# EAGLE board Varella_Aquisition_Module v.2.0 (EAGLE 9.4.2)
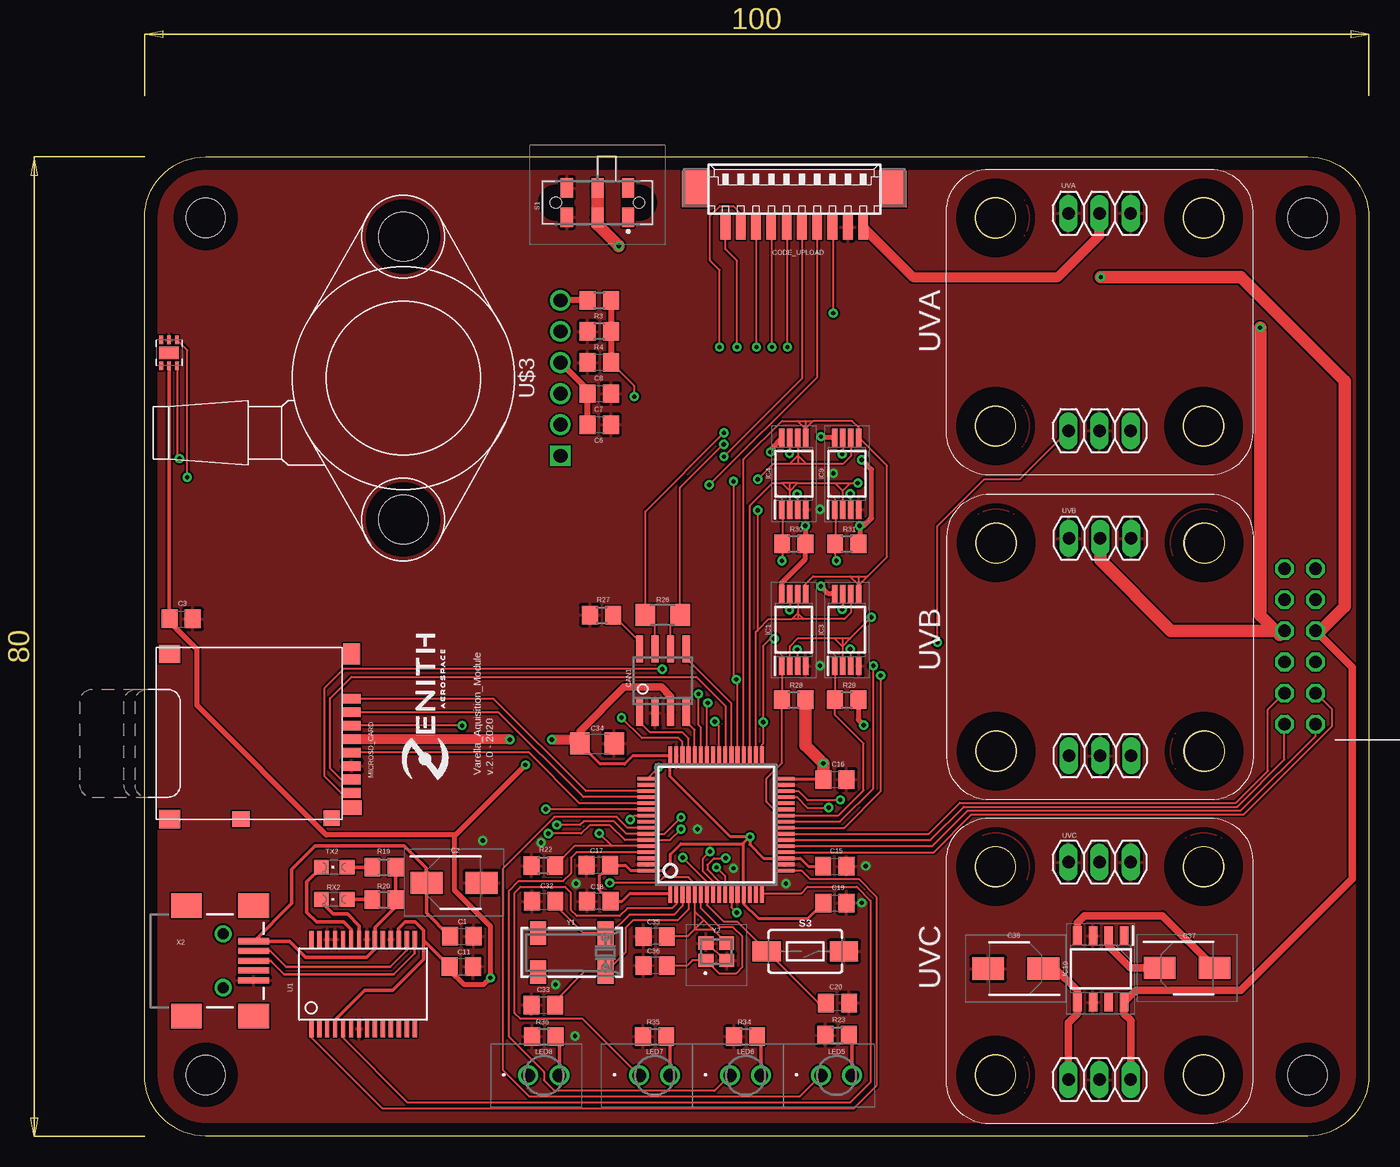
[diagram p0: board, top side]
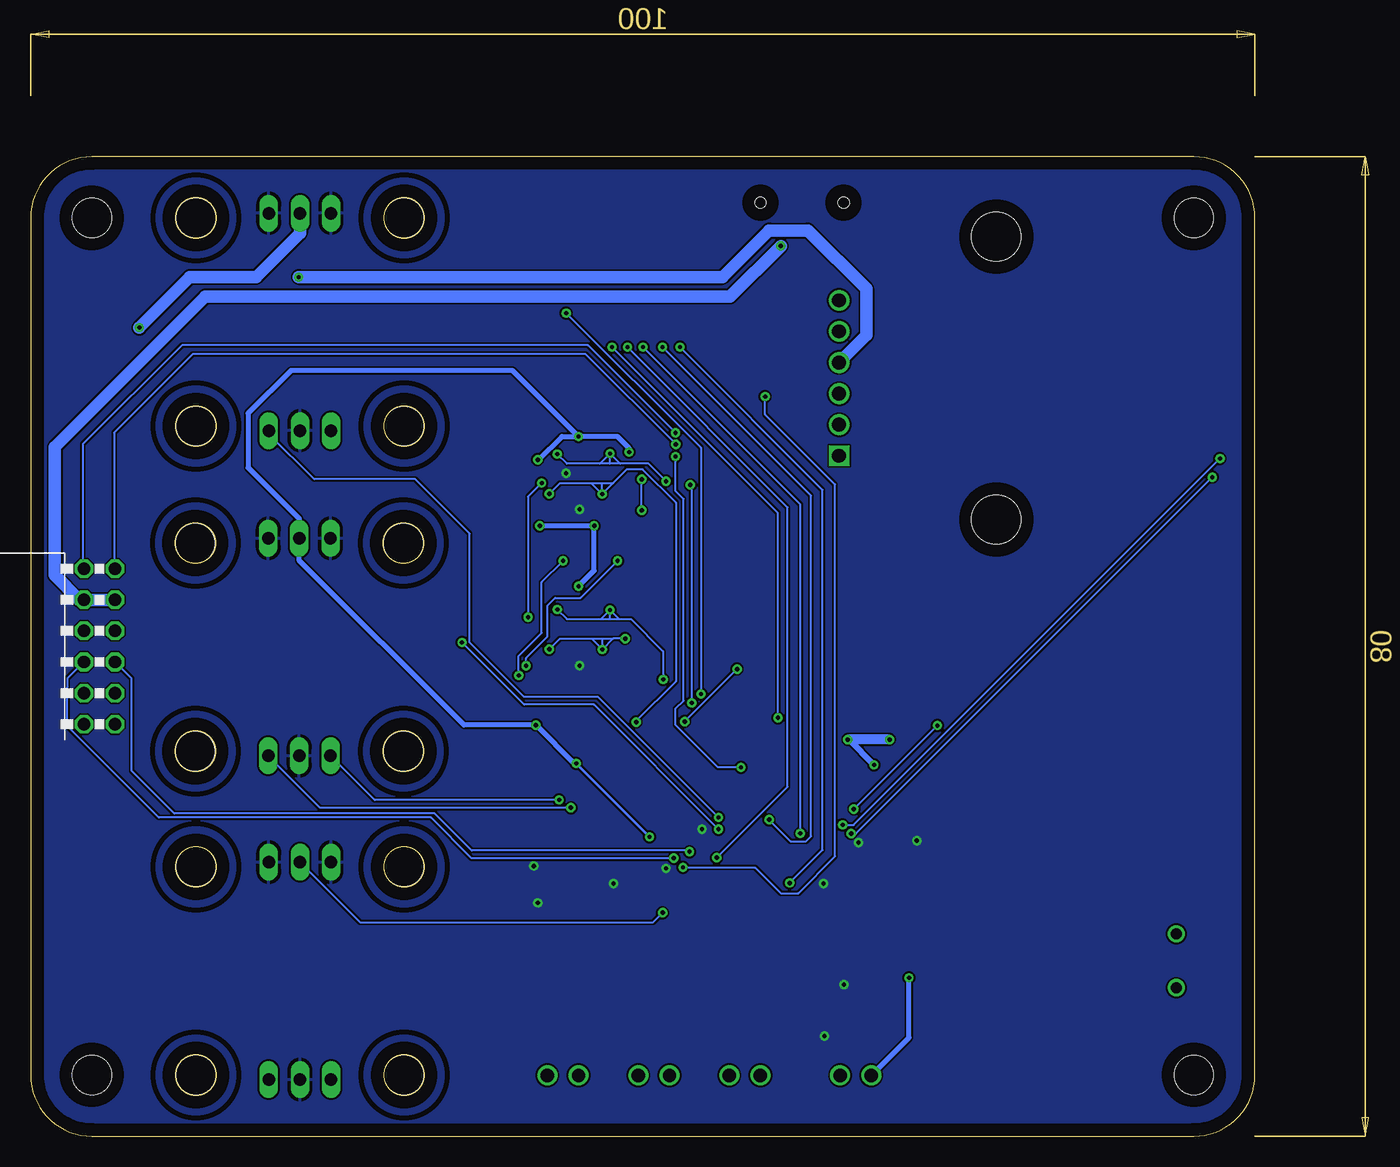
[diagram p1: board, bottom side, seen from below]

Size 100 x 80 mm. Coordinates in mm from the lower left corner, seen from the top.
Outline: 5,80 95,80 arc-90 100,75 100,5 arc-90 95,0 5,0 arc-90 0,5 0,75 arc-90 5,80
Copper layers (1*16): Top 0.035mm / dielectric 1.5mm / Bottom 0.035mm
Design rules "default": minimum track width 6mil, minimum drill 0.35mm, track to track 6mil, track to pad 6mil, pad to pad 6mil, via to via 6mil, smd to smd 6mil, copper to edge 40mil, drill to drill 6mil, minimum pad ring 10mil, minimum via ring 8mil, stop-mask expansion 4mil, vias tented up to drill 0mil, thermal gap 10mil
Net classes: 1 power: width 0.254 mm
Holes 3.2 mm at 5,5 95,5 95,75 5,75 69.5,75 86.5,75 86.5,58 69.5,58 69.5,5 86.5,5 86.5,22 69.5,22 69.56,31.44 86.56,31.44 69.56,48.44 86.56,48.44

## Footprints (pad centres in the part's own frame; a part is rotated, then mirrored left to right if it is on the bottom)
C0805 = smd 1.3 x 1.5: 1 -0.95,0; 2 0.95,0
CAPAE430X610N = smd 2.6 x 1.8: 1 -2.25,0; 2 2.25,0
C1206 = smd 1.6 x 1.8: 1 -1.4,0; 2 1.4,0
SOIC8 = smd 0.6 x 2.2: 1 -1.905,-2.6; 2 -0.635,-2.6; 3 0.635,-2.6; 4 1.905,-2.6; 5 1.905,2.6; 6 0.635,2.6; 7 -0.635,2.6; 8 -1.905,2.6
53261-10 = smd 0.8 x 2: 1 5.625,-2.5; 2 4.375,-2.5; 3 3.125,-2.5; 4 1.875,-2.5; 5 0.625,-2.5; 6 -0.625,-2.5; 7 -1.875,-2.5; 8 -3.125,-2.5; 9 -4.375,-2.5; 10 -5.625,-2.5 | smd 2.1 x 3: S1 8.125,0.625; S2 -8.125,0.625
LQFP64_10X10 = smd 0.3 x 1.6: 1 -3.75,-5.6; 2 -3.25,-5.6; 3 -2.75,-5.6; 4 -2.25,-5.6; 5 -1.75,-5.6; 6 -1.25,-5.6; 7 -0.75,-5.6; 8 -0.25,-5.6; 9 0.25,-5.6; 10 0.75,-5.6; 11 1.25,-5.6; 12 1.75,-5.6; 13 2.25,-5.6; 14 2.75,-5.6; 15 3.25,-5.6; 16 3.75,-5.6; 33 3.75,5.6; 34 3.25,5.6; 35 2.75,5.6; 36 2.25,5.6; 37 1.75,5.6; 38 1.25,5.6; 39 0.75,5.6; 40 0.25,5.6; 41 -0.25,5.6; 42 -0.75,5.6; 43 -1.25,5.6; 44 -1.75,5.6; 45 -2.25,5.6; 46 -2.75,5.6; 47 -3.25,5.6; 48 -3.75,5.6 | smd 1.6 x 0.3: 17 5.6,-3.75; 18 5.6,-3.25; 19 5.6,-2.75; 20 5.6,-2.25; 21 5.6,-1.75; 22 5.6,-1.25; 23 5.6,-0.75; 24 5.6,-0.25; 25 5.6,0.25; 26 5.6,0.75; 27 5.6,1.25; 28 5.6,1.75; 29 5.6,2.25; 30 5.6,2.75; 31 5.6,3.25; 32 5.6,3.75; 49 -5.6,3.75; 50 -5.6,3.25; 51 -5.6,2.75; 52 -5.6,2.25; 53 -5.6,1.75; 54 -5.6,1.25; 55 -5.6,0.75; 56 -5.6,0.25; 57 -5.6,-0.25; 58 -5.6,-0.75; 59 -5.6,-1.25; 60 -5.6,-1.75; 61 -5.6,-2.25; 62 -5.6,-2.75; 63 -5.6,-3.25; 64 -5.6,-3.75
SOP65P640X120-8N = smd 1.475 x 0.45: 1 -2.938,0.975; 2 -2.938,0.325; 3 -2.938,-0.325; 4 -2.938,-0.975; 5 2.938,-0.975; 6 2.938,-0.325; 7 2.938,0.325; 8 2.938,0.975
SOIC127P600X175-8N@1 = smd 1.525 x 0.7: 1 -2.712,1.905; 2 -2.712,0.635; 3 -2.712,-0.635; 4 -2.712,-1.905; 5 2.712,-1.905; 6 2.712,-0.635; 7 2.712,0.635; 8 2.712,1.905
PINHEAD_2X6_2.54MM_90º = drill 1.016 octagon: 1 0,0.04; 2 0,2.58; 3 2.54,0.04; 4 2.54,2.58; 5 5.08,0.04; 6 5.08,2.58; 7 7.62,0.04; 8 7.62,2.58; 9 10.16,0.04; 10 10.16,2.58; 11 12.7,0.04; 12 12.7,2.58
TLLG4400AS12 = drill 1.09 pad 1.635: 1 0,0; 2 2.54,0
MOLEX-502774-0891-MICROSD = smd 0.8 x 1.5: 1 -3.3,8.2; 2 -2.2,8.2; 3 -1.1,8.2; 4 0,8.2; 5 1.1,8.2; 6 2.2,8.2; 7 3.3,8.2; 8 4.4,8.2 | smd 1.29 x 1.3: 9 6.455,6.55 | smd 1.29 x 1.4: 10 6.54,-0.85 | smd 1.5 x 1.7: 11 6.54,-6.65; 12 -6.96,-6.65 | smd 1.7 x 1.4: 14 -6.96,8.2 | smd 1.2 x 1.6: 15 5.6,8.2
R0805 = smd 1.3 x 1.5: 1 -0.95,0; 2 0.95,0
R1206 = smd 1.6 x 1.803: 1 -1.422,0; 2 1.422,0
CHIPLED_0805 = smd 1.2 x 1.2: A 0,-1.05; C 0,1.05
JS202011JAQN = smd 1 x 1.6: 1 -2.5,2.95; 2 0,2.95; 3 2.5,2.95; 4 -2.5,0.55; 5 0,0.55; 6 2.5,0.55 | hole 0.9: -3.4,1.75; 3.4,1.75
TACTILE_SWITCH_SMD_6.0X3.5MM = smd 2.3 x 1.6: 1 -3.15,0; 2 3.15,0
SSOP28DB = smd 0.348 x 1.397: 1 -4.225,-3.656; 2 -3.575,-3.656; 3 -2.925,-3.656; 4 -2.275,-3.656; 5 -1.625,-3.656; 6 -0.975,-3.656; 7 -0.325,-3.656; 8 0.325,-3.656; 9 0.975,-3.656; 10 1.625,-3.656; 11 2.275,-3.656; 12 2.925,-3.656; 13 3.575,-3.656; 14 4.225,-3.656; 15 4.225,3.656; 16 3.575,3.656; 17 2.925,3.656; 18 2.275,3.656; 19 1.625,3.656; 20 0.975,3.656; 21 0.325,3.656; 22 -0.325,3.656; 23 -0.975,3.656; 24 -1.625,3.656; 25 -2.275,3.656; 26 -2.925,3.656; 27 -3.575,3.656; 28 -4.225,3.656
UVA_MODULE = drill 1.016 long: 1 9.96,-3.62; 2 12.5,-3.62; 3 15.04,-3.62; 4 9.96,-21.38; 5 12.5,-21.38; 6 15.04,-21.38
TI-S-PWSON-N6 = smd 0.3 x 0.7: 1 -0.65,-1.05; 2 0,-1.05; 3 0.65,-1.05; 4 0.65,1.05; 5 0,1.05; 6 -0.65,1.05 | smd 1.6 x 1: 7 0,0
MPX5700GP = drill 1.13 pad 1.695: 1 12.7,0; 2 10.16,0; 3 7.62,0; 4 5.08,0; 5 2.54,0 | drill 1.13 pad 1.695 square: 6 0,0 | hole 4: -5.205,12.83; 17.9,12.83
UVB_MODULE = drill 1.016 long: 1 10.01,-3.67; 2 12.55,-3.67; 3 15.09,-3.67; 4 10.01,-21.43; 5 12.55,-21.43; 6 15.09,-21.43
UVC_MODULE = drill 1.016 long: 1 9.96,-3.62; 2 12.5,-3.62; 3 15.04,-3.62; 4 9.96,-21.38; 5 12.5,-21.38; 6 15.04,-21.38
USB-MINIB-NOSTOP = smd 2.5 x 0.5: D+ 2.5,0; D- 2.5,0.8; GND 2.5,-1.6; ID 2.5,-0.8; VBUS 2.5,1.6 | smd 2.5 x 2: G1 -3,-4.5; G2 -3,4.5; G3 2.5,4.5; G4 2.5,-4.5 | drill 0.9 pad 0.8: H1 0,2.2 | drill 0.9 pad 0.787: H2 0,-2.2
CRYSTAL_8X3.8 = smd 1.3 x 1.9: P$1 -2.75,-1.6; P$2 2.75,-1.6; P$3 2.75,1.6; P$4 -2.75,1.6
FA20H160000MF12ZAC3 = smd 1.2 x 1.1: 1 -0.85,-0.7; 2 0.85,-0.7; 3 0.85,0.7; 4 -0.85,0.7

## Placement (x,y rotation side)
C1  0.1uF  [C0805]  25.91,16.33 0 top
C2  10uF  [CAPAE430X610N]  25.28,20.7 0 top
C3  100nF  [C0805]  3,42.25 0 top
C6  10nF  [C0805]  37.14,58.11 0 top
C7  1uF  [C0805]  37.14,60.65 0 top
C8  330nF  [C0805]  37.14,63.19 180 top
C11  0.1uF  [C0805]  25.88,13.85 0 top
C15  100nF  [C0805]  56.38,22.04 0 top
C16  100nF  [C0805]  56.39,29.13 0 top
C17  100nF  [C0805]  37.06,22.13 180 top
C18  100nF  [C0805]  37.1,19.18 180 top
C19  100nF  [C0805]  56.4,19.05 0 top
C20  0,1uF  [C0805]  56.6,10.88 180 top
C32  10pF  [C0805]  32.6,19.19 0 top
C33  10pF  [C0805]  32.57,10.71 0 top
C34  1nF  [C1206]  36.96,32.06 0 top
C35  10pF  [C0805]  41.71,16.31 180 top
C36  10pF  [C0805]  41.71,13.94 180 top
C37  10uF  [CAPAE430X610N]  85.15,13.74 0 top
C38  10uF  [CAPAE430X610N]  71.15,13.69 180 top
CAN1  SN65HVD233D  [SOIC8]  42.33,37.19 0 top
CODE_UPLOAD  53261-10  [53261-10]  53.07,76.73 0 top
COMM_MICRO2  STM32L496RGT6  [LQFP64_10X10]  46.69,25.44 0 top
IC1  M95M04-DRDW6TP  [SOP65P640X120-8N]  53.03,41.36 90 top
IC3  M95M04-DRDW6TP  [SOP65P640X120-8N]  57.36,41.36 90 top
IC4  M95M04-DRDW6TP  [SOP65P640X120-8N]  53.04,54.1 90 top
IC9  M95M04-DRDW6TP  [SOP65P640X120-8N]  57.37,54.1 90 top
IC10  ICL7660SCBAZ  [SOIC127P600X175-8N@1]  78.1,13.66 270 top
JP2  PINHEAD_2X6_2.54MM_90º  [PINHEAD_2X6_2.54MM_90º]  93.07,33.65 90 bottom
LED5  TLLG4400-AS12  [TLLG4400AS12]  55.25,4.96 0 top
LED6  TLLG4400-AS12  [TLLG4400AS12]  47.82,4.96 0 top
LED7  TLLG4400-AS12  [TLLG4400AS12]  40.4,4.96 0 top
LED8  TLLG4400-AS12  [TLLG4400AS12]  31.34,4.96 0 top
MICROSD_CARD  MOLEX-502774-0891-MICROSD  [MOLEX-502774-0891-MICROSD]  8.72,32.43 270 top
R3  750  [R0805]  37.14,68.27 0 top
R4  1,3k  [R0805]  37.14,65.73 180 top
R19  1K  [R0805]  19.56,21.98 0 top
R20  1K  [R0805]  19.56,19.32 0 top
R22  1K  [R0805]  32.57,22.1 180 top
R23  220  [R0805]  56.58,8.26 0 top
R26  120  [R1206]  42.33,42.56 0 top
R27  100  [R0805]  37.33,42.56 0 top
R28  100k  [R0805]  53.03,35.64 0 top
R29  100k  [R0805]  57.36,35.64 0 top
R30  100k  [R0805]  53.04,48.39 0 top
R31  100k  [R0805]  57.37,48.39 0 top
R34  220  [R0805]  49.09,8.14 0 top
R35  220  [R0805]  41.67,8.14 0 top
R36  220  [R0805]  32.61,8.14 0 top
RX2  Green  [CHIPLED_0805]  15.5,19.34 90 top
S1  JS202011JAQN  [JS202011JAQN]  37,78 180 top
S3  MOMENTARY-SWITCH-SPST-SMD-6.0X3.5MM  [TACTILE_SWITCH_SMD_6.0X3.5MM]  53.97,15.09 180 top
TX2  Red  [CHIPLED_0805]  15.5,21.97 90 top
U1  FT232RLSSOP  [SSOP28DB]  17.85,12.43 0 top
U$1  UVA_MODULE  [UVA_MODULE]  65.5,79 0 top
U$2  HDC1080  [TI-S-PWSON-N6]  2.01,63.98 180 top
U$3  MPX5700GP  [MPX5700GP]  33.97,55.57 90 top
U$4  UVB_MODULE  [UVB_MODULE]  65.5,52.5 0 top
U$5  UVC_MODULE  [UVC_MODULE]  65.5,26 0 top
X2  USB-SMD-NS  [USB-MINIB-NOSTOP]  6.42,14.33 0 top
Y1  [CRYSTAL_8X3.8]  34.9,15 180 top
Y2  FA-20H_16.0000MF10Z-AJ0  [FA20H160000MF12ZAC3]  46.71,15.06 0 top

## Library data of the parts
C1 C3 C6-C8 C11 C15-C20 C32-C36 = rcl; SPICEPREFIX: C
C2 C37 C38 = SamacSys_Parts; DESCRIPTION: Cap Aluminum Lytic 10uF 10V 20% (4 X 5.8mm) SMD 1.35 Ohm 90mA 2000h 105C Automotive T/R; HEIGHT: 6.1mm; MANUFACTURER_NAME: Panasonic; MANUFACTURER_PART_NUMBER: EEE-FN1A100R; MOUSER_PART_NUMBER: 667-EEE-FN1A100R; MOUSER_PRICE-STOCK: https://www.mouser.co.uk/ProductDetail/Panasonic/EEE-FN1A100R?qs=OlC7AqGiEDnwyj8%252BXXw94g%3D%3D
CAN1 = SN65HVD233D; AVAILABILITY: Unavailable; DESCRIPTION: 3.3V CAN Transceiver with Standby Mode, Loop-back 8-SOIC -40 to 125; MF: Texas Instruments; MP: SN65HVD233D; PACKAGE: SOIC-8 Texas Instruments; PRICE: None
CODE_UPLOAD = con-molex; MF: MOLEX; OC_FARNELL: unknown; OC_NEWARK: unknown
COMM_MICRO2 = STM32L4xxx; FARNELL: 2725138; FLASH: 1024kB; SRAM: 320kB
IC1 IC3 IC4 IC9 = SamacSys_Parts; DESCRIPTION: EEPROM 4-Mbit serial SPI bus EEPROM; HEIGHT: 1.2mm; MANUFACTURER_NAME: STMicroelectronics; MANUFACTURER_PART_NUMBER: M95M04-DRDW6TP; MOUSER_PART_NUMBER: 511-M95M04-DRDW6TP; MOUSER_PRICE-STOCK: https://www.mouser.co.uk/ProductDetail/STMicroelectronics/M95M04-DRDW6TP?qs=wnTfsH77Xs5ZmZ71YtTm4A%3D%3D
IC10 = SamacSys_Parts; DESCRIPTION: CMOS VOLTAGE CONVERTER; HEIGHT: 1.75mm; MANUFACTURER_NAME: Intersil; MANUFACTURER_PART_NUMBER: ICL7660SCBAZ; MOUSER_PART_NUMBER: 968-ICL7660SCBAZ; MOUSER_PRICE-STOCK: http://www.mouser.com/Search/ProductDetail.aspx?qs=sIflSk8B27a55iJGsgXUkw%3d%3d
JP2 = Pinhead-Zenith
LED5-LED8 = SamacSys_Parts; DESCRIPTION: Standard LEDs - Through Hole Green; 1.2mcd; 3mm 562-575nm; 1.9V Typ; HEIGHT: 6.1mm; MANUFACTURER_NAME: Vishay; MANUFACTURER_PART_NUMBER: TLLG4400-AS12; MOUSER_PART_NUMBER: 78-TLLG4400-AS12; MOUSER_PRICE-STOCK: https://www.mouser.co.uk/ProductDetail/Vishay-Semiconductors/TLLG4400-AS12?qs=ZTK%252Bjoi3Sg6xGMde4j6A1A%3D%3D
MICROSD_CARD = Ava; FARNELL: 2064063
R3 R4 R19 R20 R22 R23 R26-R31 R34-R36 = rcl; SPICEPREFIX: R
RX2 TX2 = led
S1 = SamacSys_Parts; DESCRIPTION: JS Series Sub-Miniature Slide Switch; HEIGHT: 3mm; MANUFACTURER_NAME: C & K COMPONENTS; MANUFACTURER_PART_NUMBER: JS202011JAQN; MOUSER_PART_NUMBER: 611-JS202011JAQN; MOUSER_PRICE-STOCK: https://www.mouser.co.uk/ProductDetail/CK/JS202011JAQN?qs=74EMXstkWMXDMLzbTlF50w%3D%3D
S3 = SparkFun-Switches; PROD_ID: SWCH-00815; SF_SKU: COM-08229
U1 X2 = SparkFun
U$1 U$4 U$5 = Zenith_Breakouts
U$2 = Texas-HDC1080
U$3 = MPX5700
Y1 = microbuilder
Y2 = SamacSys_Parts; HEIGHT: 0.55mm; MANUFACTURER_NAME: Epson Timing; MANUFACTURER_PART_NUMBER: FA-20H 16.0000MF10Z-AJ0; MOUSER_PART_NUMBER: 732-FA-20H16MF10ZAJ0; MOUSER_PRICE-STOCK: https://www.mouser.co.uk/ProductDetail/Epson-Timing/FA-20H-160000MF10Z-AJ0?qs=f9yNj16SXrIaU%252BY5GFRuIg%3D%3D

## Nets
5V_COM: C1.1 C2.1 R19.2 R20.2 U1.20 X2.VBUS
!HOLD: COMM_MICRO2.37 IC1.7 IC3.7 IC4.7 IC9.7
!S1: COMM_MICRO2.27 IC1.1 R28.1
!S2: COMM_MICRO2.26 IC3.1 R29.1
!S3: COMM_MICRO2.25 IC4.1 R30.1
!S4: COMM_MICRO2.24 IC9.1 R31.1
!W: COMM_MICRO2.33 IC1.3 IC3.3 IC4.3 IC9.3
+3V3: C3.1 C11.1 C15.1 C16.1 C17.1 C18.1 C19.1 C34.1 CAN1.3 CODE_UPLOAD.1 COMM_MICRO2.1 COMM_MICRO2.13 COMM_MICRO2.19 COMM_MICRO2.32 COMM_MICRO2.48 COMM_MICRO2.64 IC1.8 IC3.8 IC4.8 IC9.8 JP2.7 LED8.1 MICROSD_CARD.4 R28.2 R29.2 R30.2 R31.2 U1.4 U1.17 U$1.2 U$2.5 U$4.2
+5V: C6.1 C7.1 IC10.8 JP2.8 U$3.3 U$5.6
-5V: C38.1 IC10.5 U$5.4
BOOT: CODE_UPLOAD.8 COMM_MICRO2.60 R22.1
CAN1_LBK: CAN1.5 COMM_MICRO2.38
CAN1_RX: CAN1.4 COMM_MICRO2.44
CAN1_TX: CAN1.1 COMM_MICRO2.45
CAN_H: CAN1.7 JP2.12 R26.1
CAN_L: CAN1.6 JP2.11 R26.2
CRYSTAL1: C32.2 COMM_MICRO2.3 Y1.P$1
CTS: U1.11
DTR: U1.2
GND [power]: C1.2 C2.2 C3.2 C6.2 C7.2 C8.2 C11.2 C15.2 C16.2 C17.2 C18.2 C19.2 C20.1 C32.1 C33.1 C34.2 C35.2 C36.2 C38.2 CAN1.2 CODE_UPLOAD.2 COMM_MICRO2.12 COMM_MICRO2.18 COMM_MICRO2.31 COMM_MICRO2.47 COMM_MICRO2.63 IC1.4 IC3.4 IC4.4 IC9.4 IC10.3 IC10.6 MICROSD_CARD.6 R4.2 R22.2 R23.1 R27.1 R34.1 R35.1 R36.1 S1.3 S1.6 S3.1 U1.7 U1.18 U1.21 U1.25 U1.26 U$1.1 U$1.3 U$1.5 U$2.2 U$4.1 U$4.3 U$4.5 U$5.1 U$5.3 U$5.5 X2.GND Y2.2 Y2.4
GND_V: JP2.9 JP2.10 S1.2 S1.5
LED_DEBUG: COMM_MICRO2.2 LED7.1
LED_SD: COMM_MICRO2.57 LED5.1
LED_USB: COMM_MICRO2.61 LED6.1
MISO_BUS: COMM_MICRO2.22 JP2.1
MISO_MEMORY: COMM_MICRO2.35 IC1.2 IC3.2 IC4.2 IC9.2
MOSI_BUS: COMM_MICRO2.23 JP2.3
MOSI_MEMORY: COMM_MICRO2.36 IC1.5 IC3.5 IC4.5 IC9.5
N$3: MICROSD_CARD.10
N$4: MICROSD_CARD.9
N$5: U$3.2
N$6: R3.1 U$3.1
N$10: C33.2 COMM_MICRO2.4 Y1.P$4
N$11: CAN1.8 R27.2
N$12: C37.1 IC10.2
N$13: C37.2 IC10.4
N$16: LED5.2 R23.2
N$17: LED6.2 R34.2
N$19: LED7.2 R35.2
N$20: LED8.2 R36.2
NRST: C20.2 CODE_UPLOAD.7 COMM_MICRO2.7 S3.2
NSS_BUS: COMM_MICRO2.20 JP2.4
OSC_IN: C35.1 CODE_UPLOAD.9 COMM_MICRO2.5 Y2.3
OSC_OUT: C36.1 COMM_MICRO2.6 Y2.1
PRESSÃO: C8.1 COMM_MICRO2.10 R3.2 R4.1
RXL: R20.1 RX2.A
RXLED: RX2.C U1.22
SCL1: COMM_MICRO2.58 U$1.6 U$2.6
SCL2: COMM_MICRO2.29 U$4.6
SCL3: COMM_MICRO2.8 JP2.5
SCLK_BUS: COMM_MICRO2.21 JP2.2
SCLK_MEMORY: COMM_MICRO2.34 IC1.6 IC3.6 IC4.6 IC9.6
SDA1: COMM_MICRO2.59 U$1.4 U$2.1
SDA2: COMM_MICRO2.30 U$4.4
SDA3: COMM_MICRO2.9 JP2.6
SDMMC_CK: COMM_MICRO2.53 MICROSD_CARD.5
SDMMC_CMD: COMM_MICRO2.54 MICROSD_CARD.3
SDMMC_D0: COMM_MICRO2.39 MICROSD_CARD.7
SDMMC_D1: COMM_MICRO2.40 MICROSD_CARD.8
SDMMC_D2: COMM_MICRO2.51 MICROSD_CARD.1
SDMMC_D3: COMM_MICRO2.52 MICROSD_CARD.2
SWCLK: CODE_UPLOAD.5 COMM_MICRO2.49
SWDIO: CODE_UPLOAD.6 COMM_MICRO2.46
SWO: CODE_UPLOAD.10 COMM_MICRO2.55
TXL: R19.1 TX2.A
TXLED: TX2.C U1.23
UART1_RX: CODE_UPLOAD.3 COMM_MICRO2.43
UART1_TX: CODE_UPLOAD.4 COMM_MICRO2.42
UART2_RX: COMM_MICRO2.17 U1.1
UART2_TX: COMM_MICRO2.16 U1.5
USB_D+2: U1.15 X2.D+
USB_D-2: U1.16 X2.D-
UVC: COMM_MICRO2.11 U$5.2

## Tracks (layer width: path | path; a pad name or v marks a point on that pad's centre or on a via)
5V_COM
  Top 0.305: R19.2 R20.2 20.52,18.75 18.82,17.06 U1.20 18.82,15.3 18.14,14.62 13.15,14.62 11.84,15.93 X2.VBUS 8.94,15.93 12.01,19 12.01,21.8 13.92,23.71 21.21,23.71 23.02,21.9 23.02,20.71 C2.1 23.03,18.23 24.93,16.33 C1.1
!HOLD  (via drill 0.35)
  Top 0.152: COMM_MICRO2.37 48.44,37.2 v48.33,37.31 48.1,37.54 v48.1,53.5 | 52.7,44.77 IC1.7 52.7,42.97 v52.67,42.97 | IC4.7 52.71,55.79 v52.67,55.75 | IC9.7 57.04,55.77 v56.99,55.72 | IC3.7 57.03,43.06 v56.99,43.02
  Bottom 0.152: v56.99,55.72 56.2,54.93 53.5,54.93 | 51.85,54.93 52.7,54.93 | 52.7,54.93 53.5,54.93 | v52.67,55.75 51.85,54.93 | v52.67,55.75 53.5,54.93 | v52.67,55.75 52.7,55.72 52.7,54.93 | v52.67,42.97 51.93,42.23 | 51.93,42.23 50.96,42.23 48.33,39.6 v48.33,37.31 | v56.99,43.02 56.2,42.23 53.42,42.23 | 53.42,42.23 52.7,42.23 | 52.7,42.23 51.93,42.23 | v52.67,42.97 53.42,42.23 | v52.67,42.97 52.7,42.94 52.7,42.23 | v48.1,53.5 49.53,54.93 51.85,54.93
!S1
  Top 0.152: IC1.1 52.08,38.39 R28.1 52.08,30.49 50.8,29.21 50.8,27.3 51.41,26.69 COMM_MICRO2.27
!S2
  Top 0.152: IC3.1 56.41,38.39 R29.1 56.41,34.4 58.74,32.07 58.74,28.26 56.67,26.19 COMM_MICRO2.26
!S3  (via drill 0.35)
  Top 0.152: IC4.1 52.09,51.14 R30.1 52.09,47.01 v52.07,46.99 | COMM_MICRO2.25 56.81,25.69 59.53,28.42 v59.53,38.42
  Bottom 0.152: v59.53,38.42 59.53,39.05 57.78,40.8 57.78,43.34 57.15,43.97 55.09,43.97 v52.07,46.99
!S4  (via drill 0.35)
  Top 0.152: IC9.1 56.42,51.14 R31.1 56.42,47.09 v56.52,46.99 | COMM_MICRO2.24 57.15,25.19 60.14,28.18 v60.14,37.62
  Bottom 0.152: v60.14,37.62 60.17,37.65 60.17,39.21 58.26,41.12 58.26,45.24 v56.52,46.99
!W  (via drill 0.35)
  Top 0.152: 53.35,51.17 IC4.3 53.36,52.41 v53.32,52.45 | IC9.3 57.69,52.42 v57.65,52.47 | IC1.3 53.35,39.71 v53.31,39.76 | IC3.3 57.68,39.72 v57.64,39.77 | v51.44,40.64 51.12,40.64 50.54,40.07 v50.54,33.81 50.54,32.07 50.44,31.96 COMM_MICRO2.33
  Bottom 0.152: v53.32,52.45 52.42,53.34 | v53.32,52.45 54.21,53.34 | v57.65,52.47 56.77,53.34 54.21,53.34 | 54.21,53.34 53.34,53.34 | 53.34,53.34 52.42,53.34 | v53.32,52.45 53.32,53.32 53.34,53.34 | 52.42,40.64 v53.31,39.76 | v57.64,39.77 56.77,40.64 54.19,40.64 | 54.19,40.64 53.34,40.64 53.31,40.61 | v53.31,39.76 54.19,40.64 | v53.31,39.76 53.31,40.61 | 53.31,40.61 53.28,40.64 52.42,40.64 | v51.44,40.64 52.42,40.64 | v50.54,33.81 50.54,33.91 47.31,37.15 47.31,51.75 50.01,54.45 51.31,54.45 52.42,53.34
+3V3  (via drill 0.35)
  Top 0.152: 55.32,22.04 C15.1 | 55.37,29.19 C16.1 | 35.56,31.66 C34.1 | COMM_MICRO2.64 41.6,21.69
  Top 0.254: COMM_MICRO2.32 55.37,29.19 | 55.32,22.04 54.21,22.04 53.56,22.69 COMM_MICRO2.19 50.57,22.69 49.45,23.81 v49.45,24.45 | C19.1 54.17,17.77 50.15,17.77 48.94,18.98 COMM_MICRO2.13 48.94,23.93 | COMM_MICRO2.1 39.66,19.84 39.01,19.18 C18.1 37.15,20.09 37.15,21.27 C17.1 39.28,22.13 39.71,21.69 COMM_MICRO2.64 42.33,21.69 42.94,22.3 42.94,23.02 43.81,23.89 48.9,23.89 48.94,23.93 | 48.94,23.93 v49.45,24.45 | v49.45,24.45 47.86,24.45 42.94,29.37 COMM_MICRO2.48 39.85,31.04 39.21,30.4 37.22,30.4 C34.1
  Top 0.305: U1.17 20.77,16.99 21.29,17.5 22.1,17.5 22.8,16.81 22.8,15.92 | 22.8,15.92 22.8,14.46 20.26,11.92 17.98,11.92 15.57,9.52 U1.4 | C11.1 22.86,15.92 22.8,15.92 | U$2.5 2.01,42.29 C3.1
  Top 0.406: IC9.8 55.35,57.04 v55.25,57.15 | IC4.8 51.12,56.1 v51.12,55.88 | R30.2 53.98,48.4 | v53.98,49.85 53.98,48.4 | R31.2 58.42,48.49 v58.42,49.85 58.74,49.85 59.37,50.48 59.37,54.45 v58.58,55.25 | IC3.8 55.88,44.29 v55.25,44.93 | IC1.8 52.05,45.23 53.98,47.15 53.98,48.4 | R29.2 58.31,34.01 v58.74,33.58 | C11.1 24.93,13.56 26.11,12.38 27.7,12.38 v28.26,12.94 28.26,17.14 25.32,20.08 25.32,24.53 | v31.12,30.32 25.32,24.53 | 25.32,24.53 25.32,24.61 14.84,24.61 4.29,35.16 4.29,39.77 2.01,42.05 2.01,42.29
  Top 0.61: CAN1.3 42.97,35.93 42.21,36.69 39.18,36.69 35.56,33.06 C34.1
  Top 0.813: CODE_UPLOAD.1 62.76,70.17 74.61,70.17 78,73.56 U$1.2 | MICROSD_CARD.4 29.8,32.43 v29.84,32.38 | v33.26,32.38 35.23,32.38 C34.1
  Top 1.016: U$4.2 78.05,47.05 83.8,41.3 83.81,41.27 JP2.7 92.73,40.93 91.12,42.55 v91.12,66.04 | R28.2 53.98,31.91 v55.44,30.45 C16.1
  Bottom 0.254: v55.44,30.45 v49.45,24.46 v49.45,24.45
  Bottom 0.406: v51.12,55.88 51.12,56.2 52.07,57.15 v55.25,57.15 | v55.25,57.15 60.64,62.55 78.74,62.55 82.23,59.06 82.23,54.61 78.05,50.43 U$4.2 78.05,47.01 64.61,33.58 v58.74,33.58 55.61,30.45 v55.44,30.45 | v58.42,49.85 v53.98,49.85 53.98,46.2 v55.25,44.93 | v58.58,55.25 58.5,55.25 56.6,57.15 v55.25,57.15 | LED8.1 28.26,8.05 v28.26,12.94
  Bottom 0.508: v31.12,30.32 33.18,32.38 v33.26,32.38
  Bottom 0.813: v29.84,32.38 v33.26,32.38
  Bottom 1.016: U$1.2 78,73.77 81.6,70.17 87,70.17 v91.12,66.04
+5V  (via drill 0.35)
  Top 0.508: 36.19,60.34 C7.1 | C7.1 36.19,60.97 U$3.3 | C6.1 C7.1
  Top 0.61: U$5.6 80.54,9.46 80,10 IC10.8 80.96,11.91 89.53,11.91 98.64,21.01 98.64,38.26 98.63,38.29 JP2.8
  Top 1.016: JP2.8 96.04,41.27 98.03,43.28 98.03,61.67 89.53,70.17 v78.11,70.17
  Bottom 1.016: v78.11,70.17 43.5,70.17 39.69,73.98 36.51,73.98 31.75,69.22 31.75,65.41 U$3.3
-5V
  Top 0.61: C38.1 74.41,13.69 76.19,11.9 IC10.5 76.19,10 75.46,9.27 U$5.4
BOOT  (via drill 0.35)
  Top 0.152: COMM_MICRO2.60 38.17,23.69 | 38.17,23.69 35.11,23.69 R22.1 33.52,22.14 | v37.14,24.73 38.17,23.69 | v49.98,64.45 49.98,74.2 CODE_UPLOAD.8
  Bottom 0.152: v37.14,24.73 37.14,51.6 v49.98,64.45
CAN1_LBK
  Top 0.152: COMM_MICRO2.38 47.94,35.33 44.21,39.06 44.21,39.76 CAN1.5
CAN1_RX
  Top 0.152: 44.94,31.84 COMM_MICRO2.44 | 44.94,31.83 COMM_MICRO2.44 | CAN1.4 44.24,33.88 44.94,33.18 COMM_MICRO2.44
CAN1_TX
  Top 0.152: CAN1.1 40.43,33.85 41.26,33.02 43.89,33.02 44.44,32.47 COMM_MICRO2.45
CAN_H  (via drill 0.35)
  Top 0.152: R26.1 41.7,41.78 CAN1.7 | R26.1 41.07,42.56 | R26.1 40.91,51.03 v47.33,57.45
  Bottom 0.152: v47.33,57.45 54.49,64.61 87.63,64.61 95.73,56.52 95.73,46.27 JP2.12
CAN_L  (via drill 0.35)
  Top 0.152: R26.2 42.97,41.78 CAN1.6 | R26.2 43.82,42.56 | R26.2 43.76,52.96 v47.31,56.52
  Bottom 0.152: v47.31,56.52 54.69,63.9 86.76,63.9 93.19,57.47 93.19,46.27 JP2.11
CRYSTAL1
  Top 0.152: 43.94,19.07 COMM_MICRO2.3 43.94,18.79 43.23,18.09 39.61,18.09 38.12,16.6 Y1.P$1 35.83,16.6 33.55,18.87 C32.2
GND  (via drill 0.35)
  Top 0.152: 47.4,14.36 46,15.76 Y2.4
  Top 0.254: Y2.2 47.4,14.36
  other vias: 32.38,23.97 35.24,20.64 27.62,24.13 48.1,21.88 35.16,8.18 33.58,12.38 55.17,38.42 55.17,51.2 52.39,20.64 56.28,54.13 45.16,25.08 58.58,19.05 58.9,22.07
  pour Top: 95,0 5,0 arc-90 0,5 0,75 arc-90 5,80 95,80 arc-90 100,75 100,5 arc-90
  pour Bottom: 95,0 5,0 arc-90 0,5 0,75 arc-90 5,80 95,80 arc-90 100,75 100,5 arc-90
GND_V  (via drill 0.35)
  Top 1.016: S1.5 S1.2 37,74.47 38.73,72.73 v38.73,72.71
  Bottom 1.016: v38.73,72.71 42.86,68.58 85.72,68.58 98.03,56.28 98.03,45.82 96.04,43.81 JP2.10 JP2.9
LED_DEBUG
  Top 0.152: COMM_MICRO2.2 43.44,18.96 43.09,18.62 39.44,18.62 38.8,17.98 35.31,17.98 34.84,18.46 34.84,19.89 34.36,20.36 30.71,20.36 30.23,19.89 30.23,10.04 30.71,9.57 35.79,9.57 LED7.1
LED_SD
  Top 0.152: LED5.1 53.51,3.22 31.46,3.22 29.28,5.4 29.28,21.87 33.49,26.08 38.57,26.08 39.45,25.19 COMM_MICRO2.57
LED_USB
  Top 0.152: COMM_MICRO2.61 35.28,23.19 34.84,22.74 34.84,21.47 34.2,20.84 30.55,20.84 29.76,20.05 29.76,8.12 32.62,5.26 32.62,4.57 33.5,3.69 46.55,3.69 LED6.1
MISO_BUS
  Top 0.152: COMM_MICRO2.22 64.2,24.19 66.91,26.91 89.25,26.91 93.11,30.77 JP2.1
MISO_MEMORY  (via drill 0.35)
  Top 0.152: IC9.2 57.04,52.68 | 52.07,53.34 52.71,52.7 | IC4.2 52.71,52.7 | 52.71,52.7 53.34,53.33 | 53.34,53.33 53.34,53.34 56.38,53.34 | 56.38,53.34 57.04,52.68 | 53.34,53.33 53.33,53.34 52.7,53.34 | 52.7,53.34 52.07,53.34 | 52.07,53.34 51.28,53.34 49.44,51.5 COMM_MICRO2.35 | 52.71,52.7 52.71,53.33 52.7,53.34 | IC3.2 57.03,39.96 | 56.36,40.64 53.34,40.64 52.7,40.01 IC1.2 | 57.03,39.96 56.36,40.64 | 57.04,52.68 57.04,52.72 57.66,53.34 | 56.38,53.34 57.66,53.34 | 57.66,53.34 v58.26,53.34 | 57.63,40.64 56.99,40.64 | 56.99,40.64 56.36,40.64 | 57.03,39.96 57.03,40.05 | 57.03,40.05 57.63,40.64 | 57.63,40.64 v59.37,42.39 | 57.03,40.05 57.03,40.6 56.99,40.64
  Bottom 0.152: v58.26,53.34 59.37,52.23 v59.37,42.39
MOSI_BUS
  Top 0.152: COMM_MICRO2.23 64.06,24.69 66.6,27.23 89.14,27.23 91.76,29.84 91.76,34.84 JP2.3
MOSI_MEMORY
  Top 0.152: IC4.5 54.01,57.75 53.34,58.42 | 53.34,58.42 52.07,58.42 48.94,55.29 COMM_MICRO2.36 | IC4.5 54.01,57.82 54.61,58.42 | 53.34,58.42 53.98,58.42 | 53.98,58.42 54.61,58.42 | 54.61,58.42 57.78,58.42 58.34,57.86 IC9.5 58.37,57.04 60.64,54.77 60.64,47.32 59.04,45.72 | IC4.5 54.01,58.38 53.98,58.42 | 54,45.06 IC1.5 54,45.11 54.61,45.72 57.63,45.72 | 58.33,45.01 IC3.5 58.33,45.71 58.34,45.72 | 57.63,45.72 58.33,45.01 | 59.04,45.72 58.33,45.01 | 57.63,45.72 58.34,45.72 | 58.34,45.72 59.04,45.72
N$6
  Top 0.508: R3.1 U$3.1
N$10
  Top 0.152: 44.44,19.07 COMM_MICRO2.4 44.44,18.54 43.52,17.62 39.89,17.62 39.27,17 39.27,15.02 Y1.P$4 37.63,13.41 35.9,13.41 33.52,11.03 C33.2
N$11
  Top 0.152: CAN1.8 40.43,40.42 R27.2
N$12
  Top 0.61: IC10.2 78.75,16.36 78.75,15.5 80.51,13.74 C37.1
N$13
  Top 0.61: IC10.4 76.19,17.44 76.75,18 83.14,18 C37.2
N$16
  Top 0.305: R23.2 57.79,7.99 LED5.2
N$17
  Top 0.305: R34.2 50.36,7.82 LED6.2
N$19
  Top 0.305: R35.2 42.94,7.82 LED7.2
N$20
  Top 0.305: R36.2 33.88,7.82 LED8.2
NRST  (via drill 0.35)
  Top 0.152: C20.2 55.03,10.88 S3.2 48.39,17.53 47.29,17.53 45.94,18.88 COMM_MICRO2.7 45.94,20.77 v43.96,22.74 | v51.25,64.45 51.25,74.18 CODE_UPLOAD.7
  Bottom 0.152: v43.96,22.74 38.17,28.54 38.17,51.37 v51.25,64.45
NSS_BUS
  Top 0.152: COMM_MICRO2.20 64.47,23.19 67.55,26.27 89.77,26.27 97,33.5 97,34.84 JP2.4
OSC_IN  (via drill 0.35)
  Top 0.152: C35.1 44.35,16.31 44.94,16.9 | Y2.3 46.42,16.9 | 45.71,17.61 44.94,18.38 | 44.94,18.38 COMM_MICRO2.5 44.94,20.66 44.44,21.16 42.38,21.16 41.9,20.68 v38.01,20.68 | 44.94,16.9 45.65,17.61 45.71,17.61 | 44.94,18.38 44.94,16.9 | 44.94,16.9 46.42,16.9 | 45.71,17.61 46.42,16.9 | CODE_UPLOAD.9 48.7,75.37 48.1,75.96 46.99,75.96 46.2,75.17 46.2,71.52 46.97,70.75 v46.97,64.45
  Bottom 0.152: v38.01,20.68 35.31,23.38 35.31,52.79 v46.97,64.45
OSC_OUT
  Top 0.152: C36.1 42.66,13.93 44.31,13.93 44.75,14.36 Y2.1 46.91,13.31 48.33,13.31 48.83,13.81 48.83,16.31 48.08,17.06 46.98,17.06 45.44,18.61 COMM_MICRO2.6
PRESSÃO  (via drill 0.35)
  Top 0.152: v40.01,60.4 40.01,61.28 C8.1 | COMM_MICRO2.10 47.44,21.23 v46.72,21.95
  Top 0.508: R3.2 R4.1 C8.1
  Bottom 0.152: v46.72,21.95 40.85,21.95 40.81,21.91 40.8,21.91 38.73,19.84 37.31,19.84 34.29,22.86 34.29,53.23 40.01,58.94 v40.01,60.4
RXL
  Top 0.305: R20.1 18.59,19.34 RX2.A
RXLED
  Top 0.305: U1.22 17.52,17.2 16.58,18.14 15.4,18.14 14.45,19.09 RX2.C
SCL1  (via drill 0.35)
  Top 0.152: v43.81,26.03 42.47,24.69 COMM_MICRO2.58 39.36,24.69 38.34,25.72 35.89,25.72 35.59,25.42 v33.68,25.42 | U$2.6 2.66,55.54 v2.86,55.34
  Bottom 0.152: v33.68,25.42 32.78,25.42 v2.86,55.34 | v43.81,26.03 53.66,35.88 59.69,35.88 64.14,40.32 64.14,49.21 68.58,53.66 76.83,53.66 80.54,57.36 U$1.6
SCL2  (via drill 0.35)
  Top 0.152: COMM_MICRO2.29 53.27,27.69 54.13,26.83 v55.88,26.83
  Bottom 0.152: v55.88,26.83 76.35,26.83 U$4.6
SCL3  (via drill 0.35)
  Top 0.152: COMM_MICRO2.8 46.44,20.81 45.63,21.61 45.63,22.68 v46.19,23.23
  Bottom 0.152: v46.19,23.23 46.29,23.34 63.98,23.34 66.99,26.35 88.27,26.35 91.76,29.85 91.76,37.38 JP2.5
SCLK_BUS
  Top 0.152: COMM_MICRO2.21 64.33,23.69 67.23,26.59 89.53,26.59 95.65,32.71 JP2.2
SCLK_MEMORY  (via drill 0.35)
  Top 0.152: 53.35,43.59 IC1.6 53.35,42.85 53.35,42.72 | IC9.6 57.69,55.54 57.08,54.93 53.98,54.93 | 53.36,56.33 IC4.6 53.36,54.95 53.34,54.93 | 57.68,43.59 IC3.6 57.68,42.76 57.15,42.23 53.82,42.23 | 52.7,54.93 53.36,55.58 53.98,54.97 53.98,54.93 | 52.7,54.93 51.36,54.93 v50.09,53.66 | 52.7,54.93 53.34,54.93 | 53.34,54.93 53.98,54.93 | 53.82,42.23 53.34,42.23 | 53.34,42.23 52.86,42.23 | 52.86,42.23 50.96,42.23 50.09,41.35 | 53.35,42.72 52.86,42.23 | 53.35,42.69 53.82,42.23 | 53.35,42.72 53.35,42.69 | 53.35,42.69 53.35,42.24 53.34,42.23 | 50.09,41.35 49.94,41.21 COMM_MICRO2.34 | 50.09,41.35 v50.09,51.12
  Bottom 0.152: v50.09,51.12 v50.09,53.66
SDA1  (via drill 0.35)
  Top 0.152: v43.82,25.08 42.94,24.19 COMM_MICRO2.59 39.23,24.19 38.02,25.4 36.35,25.4 35.67,24.72 v32.99,24.72 | v3.49,53.82 3.49,64.2 U$2.1 | v64.77,40.32 64.77,49.85 68.58,53.66 71.5,53.66 U$1.4
  Bottom 0.152: v3.49,53.82 32.59,24.72 v32.99,24.72 | v43.82,25.08 53.99,35.24 59.69,35.24 v64.77,40.32
SDA2  (via drill 0.35)
  Top 0.152: COMM_MICRO2.30 53.41,28.19 54.13,27.46 v56.83,27.46
  Bottom 0.152: v56.83,27.46 71.9,27.46 U$4.4
SDA3  (via drill 0.35)
  Top 0.152: COMM_MICRO2.9 46.94,20.81 45.98,21.77 45.98,22.16 46.52,22.7 v47.47,22.7
  Bottom 0.152: v47.47,22.7 63.98,22.7 67.31,26.04 89.54,26.04 97,33.5 97,36.67 97,37.38 JP2.6
SDMMC_CK
  Top 0.152: COMM_MICRO2.53 35.55,27.19 31.41,31.33 MICROSD_CARD.5
SDMMC_CMD  (via drill 0.35)
  Top 0.152: COMM_MICRO2.54 32.77,26.69 v32.77,26.71 | v25.95,33.54 16.93,33.54 MICROSD_CARD.3
  Bottom 0.152: v32.77,26.71 v25.95,33.54
SDMMC_D0
  Top 0.152: MICROSD_CARD.7 16.07,29.13 15.15,30.05 15.15,35.76 16.9,37.51 45.08,37.51 47.44,35.15 COMM_MICRO2.39
SDMMC_D1  (via drill 0.35)
  Top 0.152: COMM_MICRO2.40 46.94,33.5 v46.58,33.86 | v42.3,38.14 16.26,38.14 14.68,36.55 14.68,29.41 16.06,28.03 MICROSD_CARD.8
  Bottom 0.152: v46.58,33.86 v42.3,38.14
SDMMC_D2
  Top 0.152: COMM_MICRO2.51 36.05,28.19 28.52,35.73 MICROSD_CARD.1
SDMMC_D3
  Top 0.152: COMM_MICRO2.52 35.84,27.69 28.91,34.63 MICROSD_CARD.2
SWCLK  (via drill 0.35)
  Top 0.152: COMM_MICRO2.49 41.09,29.23 v41.98,30.13 | CODE_UPLOAD.5 53.7,61.87 v47.33,55.51
  Bottom 0.152: v41.98,30.13 43.85,30.13 47.33,33.6 47.33,34.92 46.7,35.56 46.67,35.56 46.67,52.05 47.33,52.7 v47.33,55.51
SWDIO  (via drill 0.35)
  Top 0.152: COMM_MICRO2.46 43.94,32.18 43.6,32.52 40.62,32.52 v38.96,34.17 | v52.52,64.45 52.52,74.16 CODE_UPLOAD.6
  Bottom 0.152: v52.52,64.45 38.96,50.89 v38.96,34.17
SWO  (via drill 0.35)
  Top 0.152: v39.68,25.85 40.02,26.19 COMM_MICRO2.55 | CODE_UPLOAD.10 47.45,72.44 48.39,71.49 v48.39,64.45
  Bottom 0.152: v39.68,25.85 37.92,24.09 36.66,24.09 36.27,24.49 36.27,52.32 v48.39,64.45
TXL
  Top 0.305: TX2.A R19.1
TXLED
  Top 0.305: U1.23 16.88,16.89 16.26,17.5 14.04,17.5 13.25,18.3 13.25,20.77 TX2.C
UART1_RX  (via drill 0.35)
  Top 0.152: COMM_MICRO2.43 45.44,33.4 45.25,33.59 v45.25,36.12 | CODE_UPLOAD.3 56.25,74.18 v56.25,67.23
  Bottom 0.152: v56.25,67.23 45.25,56.23 v45.25,36.12
UART1_TX  (via drill 0.35)
  Top 0.152: v46.12,53.2 54.94,62.02 CODE_UPLOAD.4 | v46.01,35.39 45.97,35.39 45.94,35.35 COMM_MICRO2.42
  Bottom 0.152: v46.12,53.2 46.01,53.08 v46.01,35.39
UART2_RX
  Top 0.152: COMM_MICRO2.17 53.66,21.69 54.35,21 58.33,21 59.78,19.55 59.78,4.13 57.9,2.24 19.46,2.24 13.62,8.08 U1.1
UART2_TX
  Top 0.152: COMM_MICRO2.16 53.64,19.84 54.16,20.36 58.17,20.36 59.31,19.23 59.31,4.42 57.63,2.74 21.5,2.74 16.23,8.02 U1.5
USB_D+2
  Top 0.203: X2.D+ 10.3,14.33 11.42,13.21 20.35,13.21 22.08,14.94 U1.15
USB_D-2
  Top 0.203: X2.D- 10.26,15.13 11.56,13.82 20.07,13.82 21.43,15.17 U1.16
UVC  (via drill 0.35)
  Top 0.152: COMM_MICRO2.11 47.94,18.69 v48.38,18.26
  Bottom 0.152: U$5.2 73.08,17.46 49.17,17.46 v48.38,18.26

## Text on the board
tNames: UVA | UVB | Varella_Aquisition_Module | v.2.0 - 2020 | UVC